# EAGLE board CAN_Wake_Up_2 (EAGLE 9.1.1)
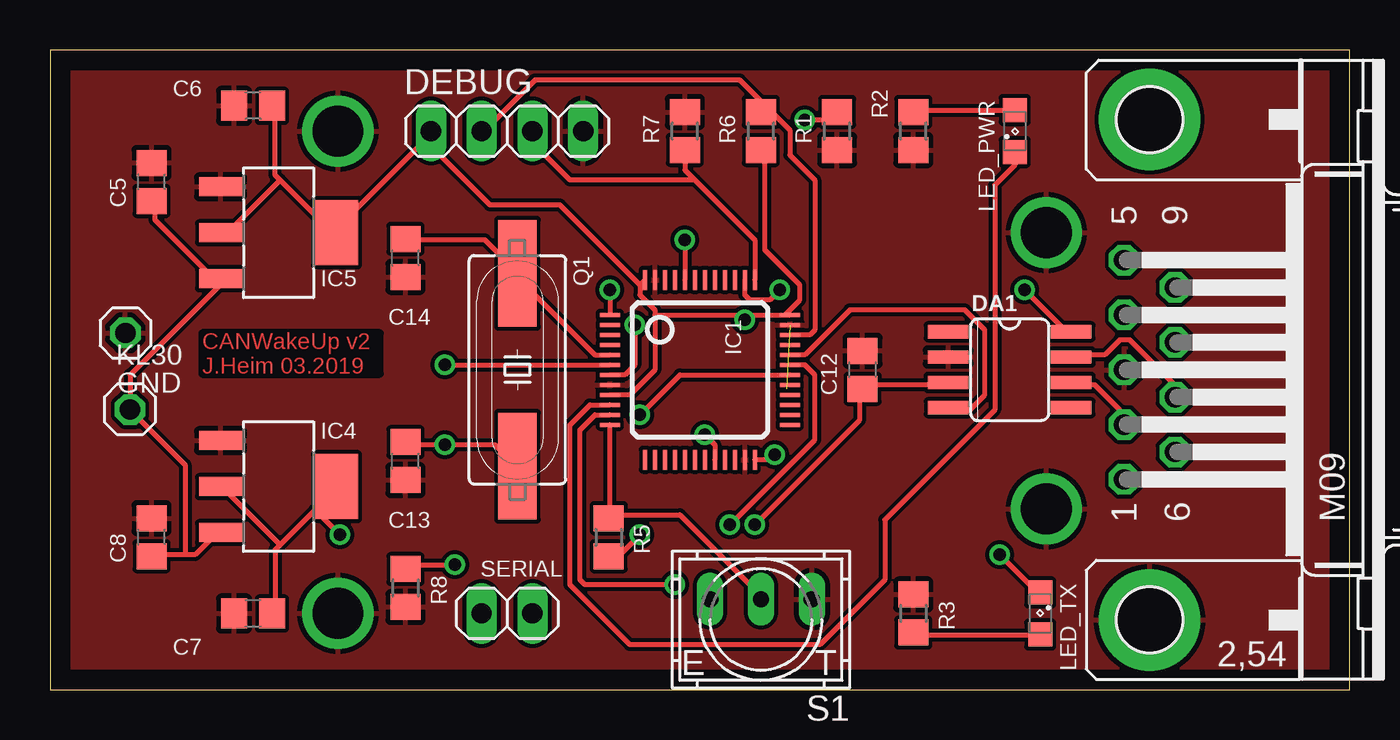
[diagram p0: board, top side]
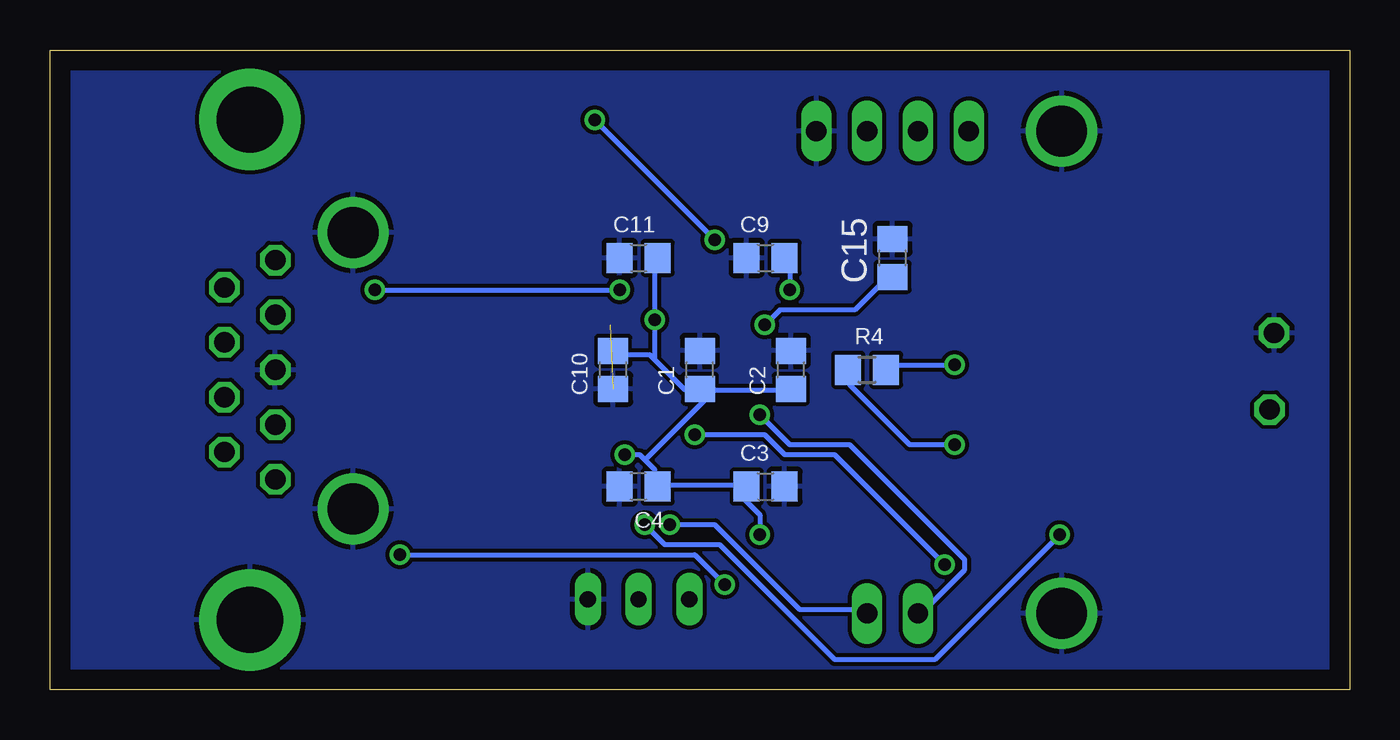
[diagram p1: board, bottom side, seen from below]

Size 65 x 32 mm. Coordinates in mm from the lower left corner, seen from the top.
Outline: 0,0 65,0 65,32 0,32 0,0
Copper layers (1*16): Top 0.035mm / dielectric 1.5mm / Bottom 0.035mm
Design rules "default": minimum track width 10mil, minimum drill 24mil, track to track 8mil, track to pad 8mil, pad to pad 8mil, via to via 8mil, smd to smd 8mil, copper to edge 40mil, drill to drill 8mil, minimum pad ring 10mil, minimum via ring 8mil, stop-mask expansion 4mil, vias tented up to drill 0mil, thermal gap 10mil

## Footprints (pad centres in the part's own frame; a part is rotated, then mirrored left to right if it is on the bottom)
C0805 = smd 1.3 x 1.5: 1 -0.95,0; 2 0.95,0
SO08 = smd 0.66 x 2.032: 1 -1.905,-3.073; 2 -0.635,-3.073; 3 0.635,-3.073; 4 1.905,-3.073; 5 1.905,3.073; 6 0.635,3.073; 7 -0.635,3.073; 8 -1.905,3.073
1X04 = drill 1.016 long: 1 -3.81,0; 2 -1.27,0; 3 1.27,0; 4 3.81,0
M09HP = drill 1.016 octagon: 1 -5.486,1.27; 2 -2.743,1.27; 3 0,1.27; 4 2.743,1.27; 5 5.486,1.27; 6 -4.115,-1.27; 7 -1.372,-1.27; 8 1.372,-1.27; 9 4.115,-1.27 | drill 3.302 pad 5.08: G1 -12.522,0; G2 12.522,0
1X01 = drill 1.016 octagon: 1 0,0
PAD_0.1000 = drill 2.54 pad 2.54: 1 0,0
TQFP48 = smd 0.2 x 1: 1 -2.75,-4.5; 2 -2.25,-4.5; 3 -1.75,-4.5; 4 -1.25,-4.5; 5 -0.75,-4.5; 6 -0.25,-4.5; 7 0.25,-4.5; 8 0.75,-4.5; 9 1.25,-4.5; 10 1.75,-4.5; 11 2.25,-4.5; 12 2.75,-4.5; 25 2.75,4.5; 26 2.25,4.5; 27 1.75,4.5; 28 1.25,4.5; 29 0.75,4.5; 30 0.25,4.5; 31 -0.25,4.5; 32 -0.75,4.5; 33 -1.25,4.5; 34 -1.75,4.5; 35 -2.25,4.5; 36 -2.75,4.5 | smd 1 x 0.2: 13 4.5,-2.75; 14 4.5,-2.25; 15 4.5,-1.75; 16 4.5,-1.25; 17 4.5,-0.75; 18 4.5,-0.25; 19 4.5,0.25; 20 4.5,0.75; 21 4.5,1.25; 22 4.5,1.75; 23 4.5,2.25; 24 4.5,2.75; 37 -4.5,2.75; 38 -4.5,2.25; 39 -4.5,1.75; 40 -4.5,1.25; 41 -4.5,0.75; 42 -4.5,0.25; 43 -4.5,-0.25; 44 -4.5,-0.75; 45 -4.5,-1.25; 46 -4.5,-1.75; 47 -4.5,-2.25; 48 -4.5,-2.75
SOT223 = smd 0.95 x 2.15: 1 -2.3,-2.9; 2 0,-2.9; 3 2.3,-2.9 | smd 3.25 x 2.15: 4 0,2.9
SML0805 = smd 1.2 x 1.2: A 1.05,0; C -1.05,0
HC49UP = smd 5.334 x 1.93: 1 -4.826,0; 2 4.826,0
R0805 = smd 1.3 x 1.5: 1 -0.95,0; 2 0.95,0
9077-1 = drill 0.813 long: 1 -2.54,-1.016; 2 0,-1.016; 3 2.54,-1.016
1X02 = drill 1.016 long: 1 -1.27,0; 2 1.27,0

## Placement (x,y rotation side)
C1  10nF  [C0805]  32.5,16 90 bottom
C2  10nF  [C0805]  27.94,16 90 bottom
C3  10nF  [C0805]  29.21,10.16 0 bottom
C4  10uF  [C0805]  35.56,10.16 180 bottom
C5  10uF  [C0805]  5.08,25.4 90 top
C6  10uF  [C0805]  10.16,29.21 180 top
C7  10uF  [C0805]  10.16,3.81 180 top
C8  10uF  [C0805]  5.08,7.62 90 top
C9  10nF  [C0805]  29.21,21.59 0 bottom
C10  1uF  [C0805]  36.83,16 90 bottom
C11  100nF  [C0805]  35.56,21.59 0 bottom
C12  100nF  [C0805]  40.64,16 90 top
C13  22pF  [C0805]  17.78,11.43 90 top
C14  22pF  [C0805]  17.78,21.59 90 top
C15  100nF  [C0805]  22.86,21.59 90 bottom
DA1  TJA1050  [SO08]  48,16 270 top
DEBUG  [1X04]  22.86,27.94 0 top
DSUB-9  CAN  [M09HP]  55,16 90 top
GND  [1X01]  3.77,17.84 0 top
H1  SPECIAL_DRILL_0.1000  [PAD_0.1000]  14.4,27.94 0 top
H2  SPECIAL_DRILL_0.1000  [PAD_0.1000]  14.4,3.81 0 top
H3  SPECIAL_DRILL_0.1000  [PAD_0.1000]  49.84,9.04 0 top
H4  SPECIAL_DRILL_0.1000  [PAD_0.1000]  49.84,22.86 0 top
IC1  STM32F10XCXT6  [TQFP48]  32.5,16 270 top
IC4  LM1117MP-5.0  [SOT223]  11.43,10.16 270 top
IC5  LM1117MP-3.3  [SOT223]  11.43,22.86 270 top
KL30  [1X01]  4,14.01 270 top
LED_PWR  RED  [SML0805]  48.26,27.94 90 top
LED_TX  GREEN  [SML0805]  49.53,3.81 270 top
Q1  8MHz  [HC49UP]  23.38,16 270 top
R1  10k  [R0805]  39.37,27.94 90 top
R2  68  [R0805]  43.18,27.94 90 top
R3  56  [R0805]  43.18,3.81 270 top
R4  390  [R0805]  24.13,16 0 bottom
R5  10k  [R0805]  27.94,7.62 270 top
R6  10k  [R0805]  35.56,27.94 90 top
R7  10k  [R0805]  31.75,27.94 90 top
R8  10k  [R0805]  17.78,5.08 270 top
S1  9077-1  [9077-1]  35.56,3.5 180 top
SERIAL  [1X02]  22.86,3.81 0 top

## Library data of the parts
C1-C15 R1-R8 = rcl
DA1 = CAN_Driver
DEBUG GND KL30 SERIAL = pinhead
DSUB-9 = con-subd; OC_FARNELL: unknown; OC_NEWARK: unknown
H1-H4 = special-drill
IC1 = stm32
IC4 = lm1117_11; MF: Texas Instruments; MPN: LM1117MP-5.0; OC_FARNELL: 9778209; OC_NEWARK: 28X3417
IC5 = lm1117_11; MF: Texas Instruments; MPN: LM1117MP-3.3; OC_FARNELL: 9778195; OC_NEWARK: 28X3416
LED_PWR LED_TX = led
Q1 = crystal; OC_FARNELL: unknown; OC_NEWARK: unknown
S1 = switch-misc

## Nets
CAN__TX_MCU: IC1.33
CAN_H: DA1.7 DSUB-9.7
CAN_L: DA1.6 DSUB-9.2
CAN_RX_MCU: DA1.4 IC1.32
CAN_S_MCU: DA1.8 IC1.38
CAN_TX_MCU: DA1.1
DBG_SWCLK: DEBUG.3 IC1.37 R7.1
DBG_SWDIO: DEBUG.2 IC1.34 R6.2
GND: C1.2 C2.2 C3.2 C4.2 C5.2 C6.2 C7.2 C8.2 C9.1 C10.1 C11.1 C12.2 C13.1 C14.1 C15.2 DA1.2 DEBUG.4 DSUB-9.3 DSUB-9.G1 GND.1 H1.1 H2.1 H3.1 H4.1 IC1.8 IC1.23 IC1.35 IC1.47 IC4.1 IC5.1 R1.1 R2.1 R3.1 R7.2 R8.2 S1.1
KL30: C5.1 C8.1 IC4.3 IC5.3 KL30.1
LED_MCU_CAN: IC1.11 LED_TX.C
LED_MCU_PWR: IC1.10 LED_PWR.C
N$1: IC1.44 R1.2
N$2: C9.2 IC1.1
N$3: LED_PWR.A R2.2
N$4: LED_TX.A R3.2
N$5: C13.2 Q1.2 R4.1
N$6: C14.2 IC1.5 Q1.1
N$7: IC1.6 R4.2
N$8: IC1.20 R8.1
N$9: C15.1 IC1.7
SW_MCU_CAN: IC1.12 R5.1 S1.2
USART1_TX: IC1.30 SERIAL.1
USART_1_RX: IC1.31 SERIAL.2
VCC_3V3: C1.1 C2.1 C3.1 C4.1 C6.1 C10.2 C11.2 DEBUG.1 IC1.9 IC1.24 IC1.36 IC1.48 IC5.2 IC5.4 R5.2 R6.1
VCC_5V: C7.1 C12.1 DA1.3 IC4.2 IC4.4

## Tracks (layer width: path | path; a pad name or v marks a point on that pad's centre or on a via)
CAN_H
  Top 0.254: DA1.7 51.25,16.75 52.75,16.75 53.5,17.5 54,17.5 56.25,15.25 56.25,14.75 DSUB-9.7
CAN_L
  Top 0.254: DA1.6 51.25,15.25 52.25,15.25 53.5,14 53.5,13.5 DSUB-9.2
CAN_RX_MCU
  Top 0.254: IC1.32 37.75,16.75 40,19 45.75,19 46.75,18 46.75,14.75 46,14 45,14 DA1.4
CAN_S_MCU  (via drill 0.61)
  Top 0.254: IC1.38 34.75,19.75 35,19.5 36,19.5 v36.5,20 | v48.75,20 51,17.75 DA1.8
  Bottom 0.254: v48.75,20 v36.5,20
DBG_SWCLK
  Top 0.254: IC1.37 35.25,22.5 32.25,25.5 | 32.25,25.5 31.75,26 31.75,26.75 R7.1 | 32.25,25.5 26,25.5 24.25,27.25 24.25,27.75 DEBUG.3
DBG_SWDIO
  Top 0.254: IC1.34 38,17.75 38.25,18 38.25,25.5 37,26.75 37,28 36.25,28.75 | 36.25,28.75 35.75,28.75 R6.2 36.25,28.75 | 36.25,28.75 34.5,30.5 24.25,30.5 21.75,28 DEBUG.2
GND  (1 unrouted)
  pour Bottom: 0,31.75 0,0 64.77,0 64.77,31.75
  pour Top: 0,31.75 0,0 64.77,0 64.77,31.75
KL30
  Top 0.254: 6.75,6.75 7.25,6.75 8.5,8 IC4.3 | 6.75,6.75 5.25,6.75 C8.1 | C5.1 5.25,24.25 5.25,23.5 8,20.75 8.5,20.75 IC5.3 8.75,20.5 4,15.75 4,14.25 KL30.1 6.75,11.25 6.75,6.75
LED_MCU_CAN  (via drill 0.61)
  Top 0.254: IC1.11 27.25,13.75 26.5,13 26.5,5.5 26.75,5.25 v31.25,5.25 | v47.5,6.75 49.5,4.75 LED_TX.C
  Bottom 0.254: v31.25,5.25 32.75,6.75 v47.5,6.75
LED_MCU_PWR
  Top 0.254: IC1.10 27,14.25 26,13.25 26,5.25 29,2.25 38.5,2.25 41.75,5.5 41.75,8.5 47.25,14 47.25,25.25 48.25,26.25 48.25,26.75 LED_PWR.C
N$1  (via drill 0.61)
  Top 0.254: v31.75,22.5 IC1.44 | v37.75,28.5 39,28.5 39.25,28.75 R1.2
  Bottom 0.254: v37.75,28.5 v31.75,22.5
N$2  (via drill 0.61)
  Top 0.254: v28,20 IC1.1
  Bottom 0.254: v28,20 28,21.25 28.25,21.5 C9.2
N$3
  Top 0.254: LED_PWR.A 43.25,29 R2.2
N$4
  Top 0.254: LED_TX.A 49.5,2.75 43.25,2.75 R3.2
N$5  (via drill 0.61)
  Top 0.254: C13.2 18,12.25 v19.75,12.25 22.25,12.25 23.25,11.25 Q1.2
  Bottom 0.254: v19.75,12.25 22,12.25 25,15.25 25,16 R4.1
N$6
  Top 0.254: IC1.5 27.25,16.75 23.25,20.75 Q1.1 23.25,21 21.75,22.5 18,22.5 C14.2
N$7  (via drill 0.61)
  Top 0.254: v19.75,16.25 IC1.6
  Bottom 0.254: v19.75,16.25 22.75,16.25 23,16 R4.2
N$8  (via drill 0.61)
  Top 0.254: IC1.20 33.25,12.25 v32.75,12.75 | v20.25,6.25 18,6.25 R8.1
  Bottom 0.254: v32.75,12.75 29.25,12.75 28.25,11.75 25.75,11.75 v20.25,6.25
N$9  (via drill 0.61)
  Top 0.254: IC1.7 28.75,15.75 29.25,16.25 v29.25,18.25
  Bottom 0.254: v29.25,18.25 28.5,19 24.75,19 23,20.75 C15.1
SW_MCU_CAN
  Top 0.254: 28,8.75 IC1.12 | 28,8.75 R5.1 28,8.75 | 28,8.75 31.5,8.75 35.5,4.75 S1.2
USART1_TX  (via drill 0.61)
  Top 0.254: IC1.30 31.5,15.75 v29.5,13.75
  Bottom 0.254: v29.5,13.75 28,12.25 25,12.25 19.25,6.5 19.25,6 21.5,3.75 SERIAL.1
USART_1_RX  (via drill 0.61)
  Top 0.254: IC1.31 37.75,16.25 38.25,15.75 38.25,12.5 v34,8.25
  Bottom 0.254: v34,8.25 31.75,8.25 27.5,4 24.25,4 SERIAL.2
VCC_3V3  (via drill 0.61)
  Top 0.254: v29.5,7.75 28.5,6.75 28,6.75 R5.2 | IC1.24 36,11.5 v36.25,11.75 | 11.5,25.5 14.25,22.75 IC5.4 14.25,23 18.75,27.5 | 11.5,25.5 11.25,25.75 11.25,29 C6.1 | 11.5,25.5 9,23 8.75,23 IC5.2 | 18.75,27.5 19,27.75 DEBUG.1 18.75,27.5 | IC1.9 29,14.75 30.25,16 30.25,18.75 | 30.25,18.75 30.25,19 29.5,19.75 29.5,20.25 | IC1.48 29.5,20.25 | 30.25,18.75 34.75,18.75 | 34.75,18.75 36.75,18.75 | 36.75,18.75 IC1.36 36.75,18.75 | 36.75,18.75 37.5,19.5 37.5,20.25 35.75,22 35.75,26.75 R6.1 | 18.75,27.5 22,24.25 25.5,24.25 29.5,20.25 | 34.75,18.75 v34.75,18.5
  Bottom 0.254: v29.5,7.75 29.5,8.75 30.25,9.5 30.25,10 C3.1 30.25,10.25 34.5,10.25 C4.1 34.75,10.25 34.75,11 IC1.24 | v36.25,11.75 35.5,11.75 IC1.24 | 32.5,15 31.75,15 | 31.75,15 28,15 C2.1 | 32.5,15 C1.1 32.5,15 | 34.75,16.5 33.25,15 32.5,15 | 34.75,16.5 35,16.75 36.75,16.75 C10.2 | 34.75,16.5 v34.75,18.5 34.75,21.5 C11.2 | 31.75,15 IC1.24
VCC_5V  (via drill 0.61)
  Top 0.254: DA1.3 44.75,15.25 40.75,15.25 C12.1 40.5,15 40.5,13.5 v35.25,8.25 | 13.25,9 14.25,10 IC4.4 | 13.25,9 11.5,7.25 | 11.5,7.25 11.25,7 11.25,4 C7.1 | 11.5,7.25 8.75,10 IC4.2 | 13.25,9 v14.5,7.75
  Bottom 0.254: v35.25,8.25 34.25,7.25 31.5,7.25 25.75,1.5 20.75,1.5 v14.5,7.75

## Text on the board
Top: CANWakeUp v2 / J.Heim 03.2019